# Altium PCB BP and Sensors.PcbDoc
Units mm, origin at the board's own origin, x right, y up, seen from the top; angles counter-clockwise.
Board outline 110 x 120 mm, 2 copper layers (Top Layer, Bottom Layer); 86 components, 108 nets, 295 pads, 0 vias.
Unrouted connection lines stored in the file: 165.
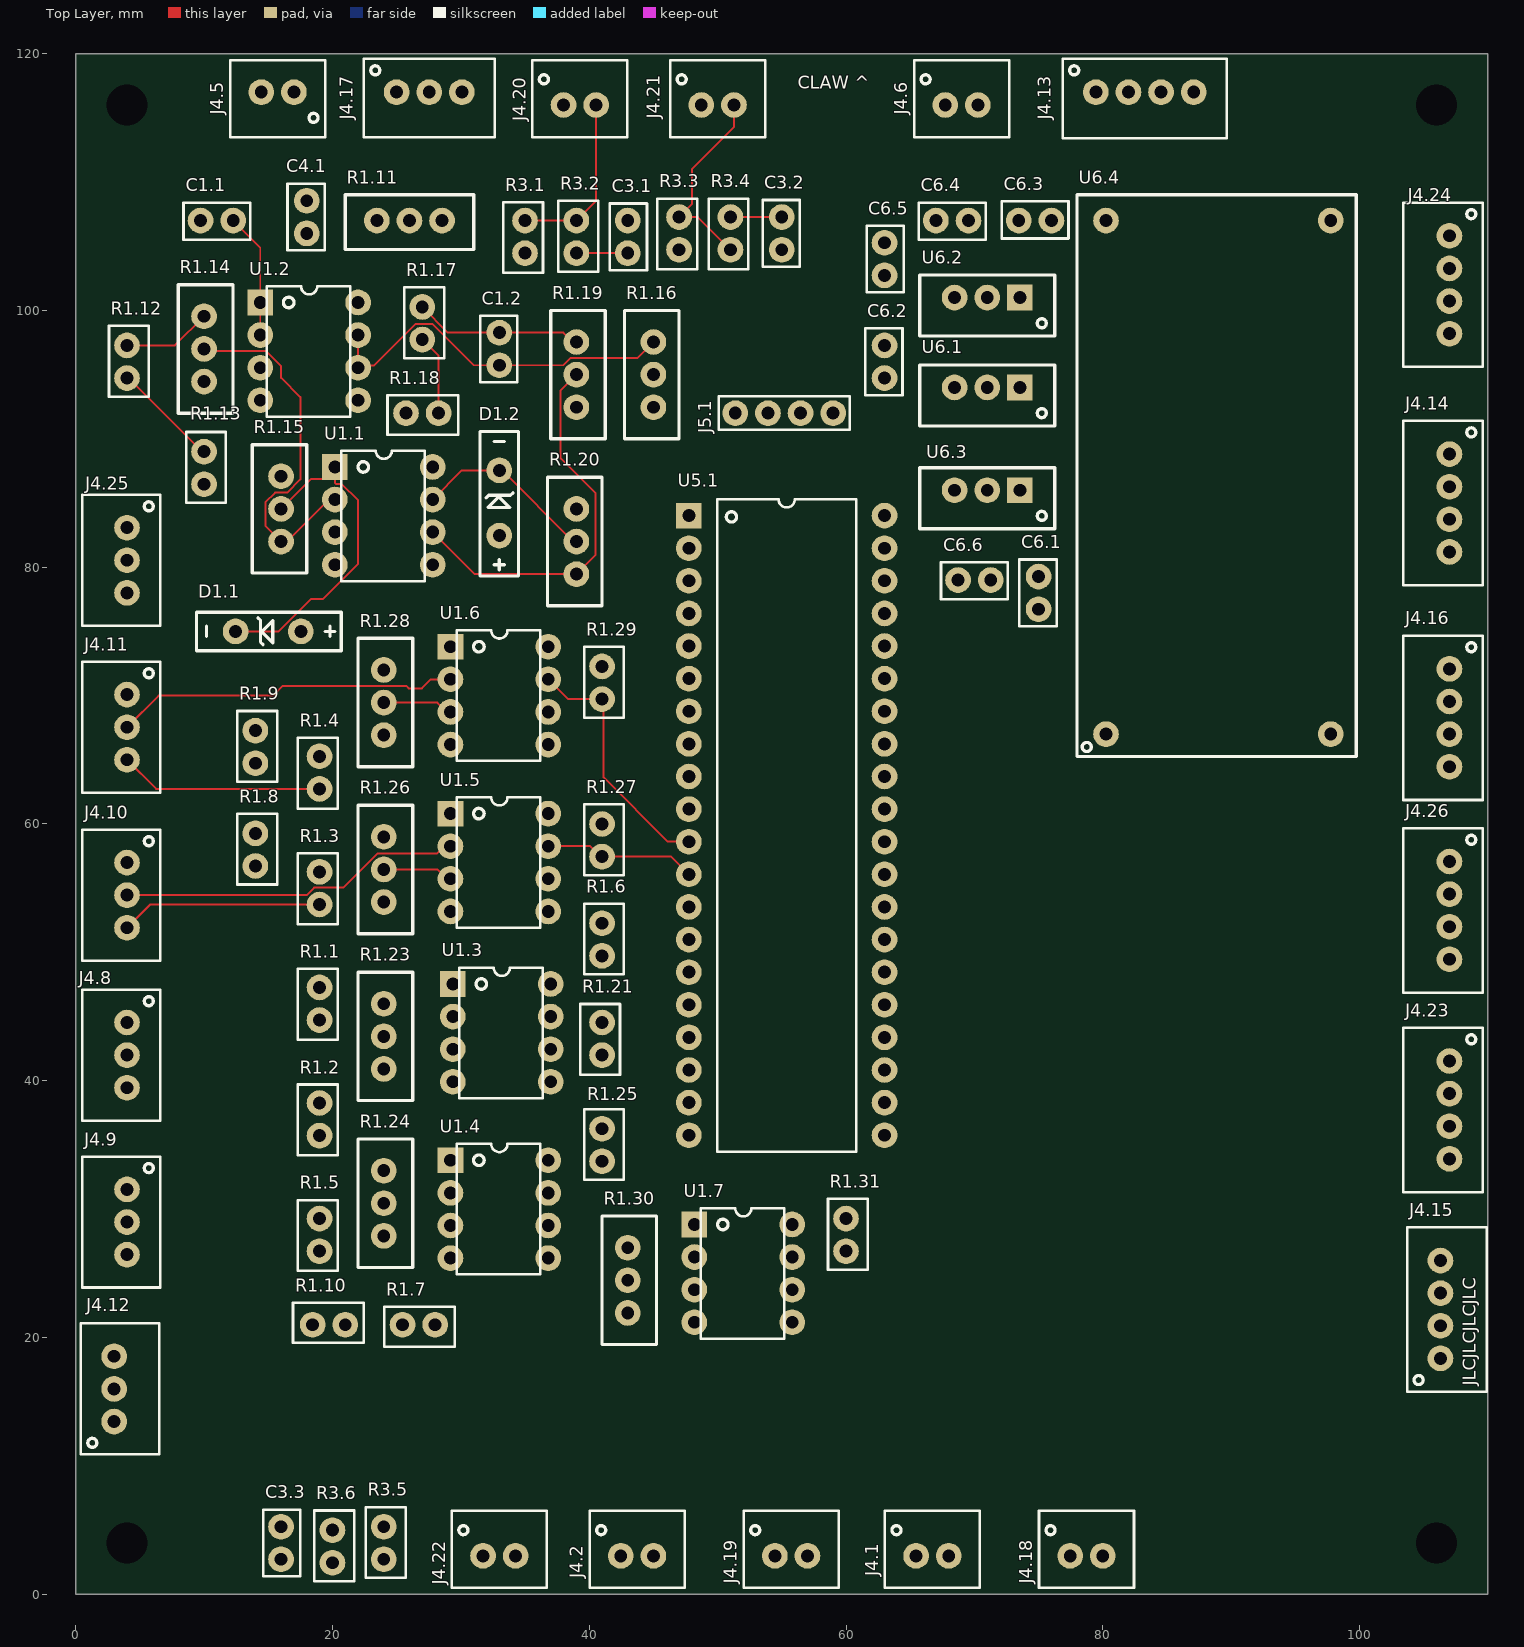
[diagram p0: Top Layer view]
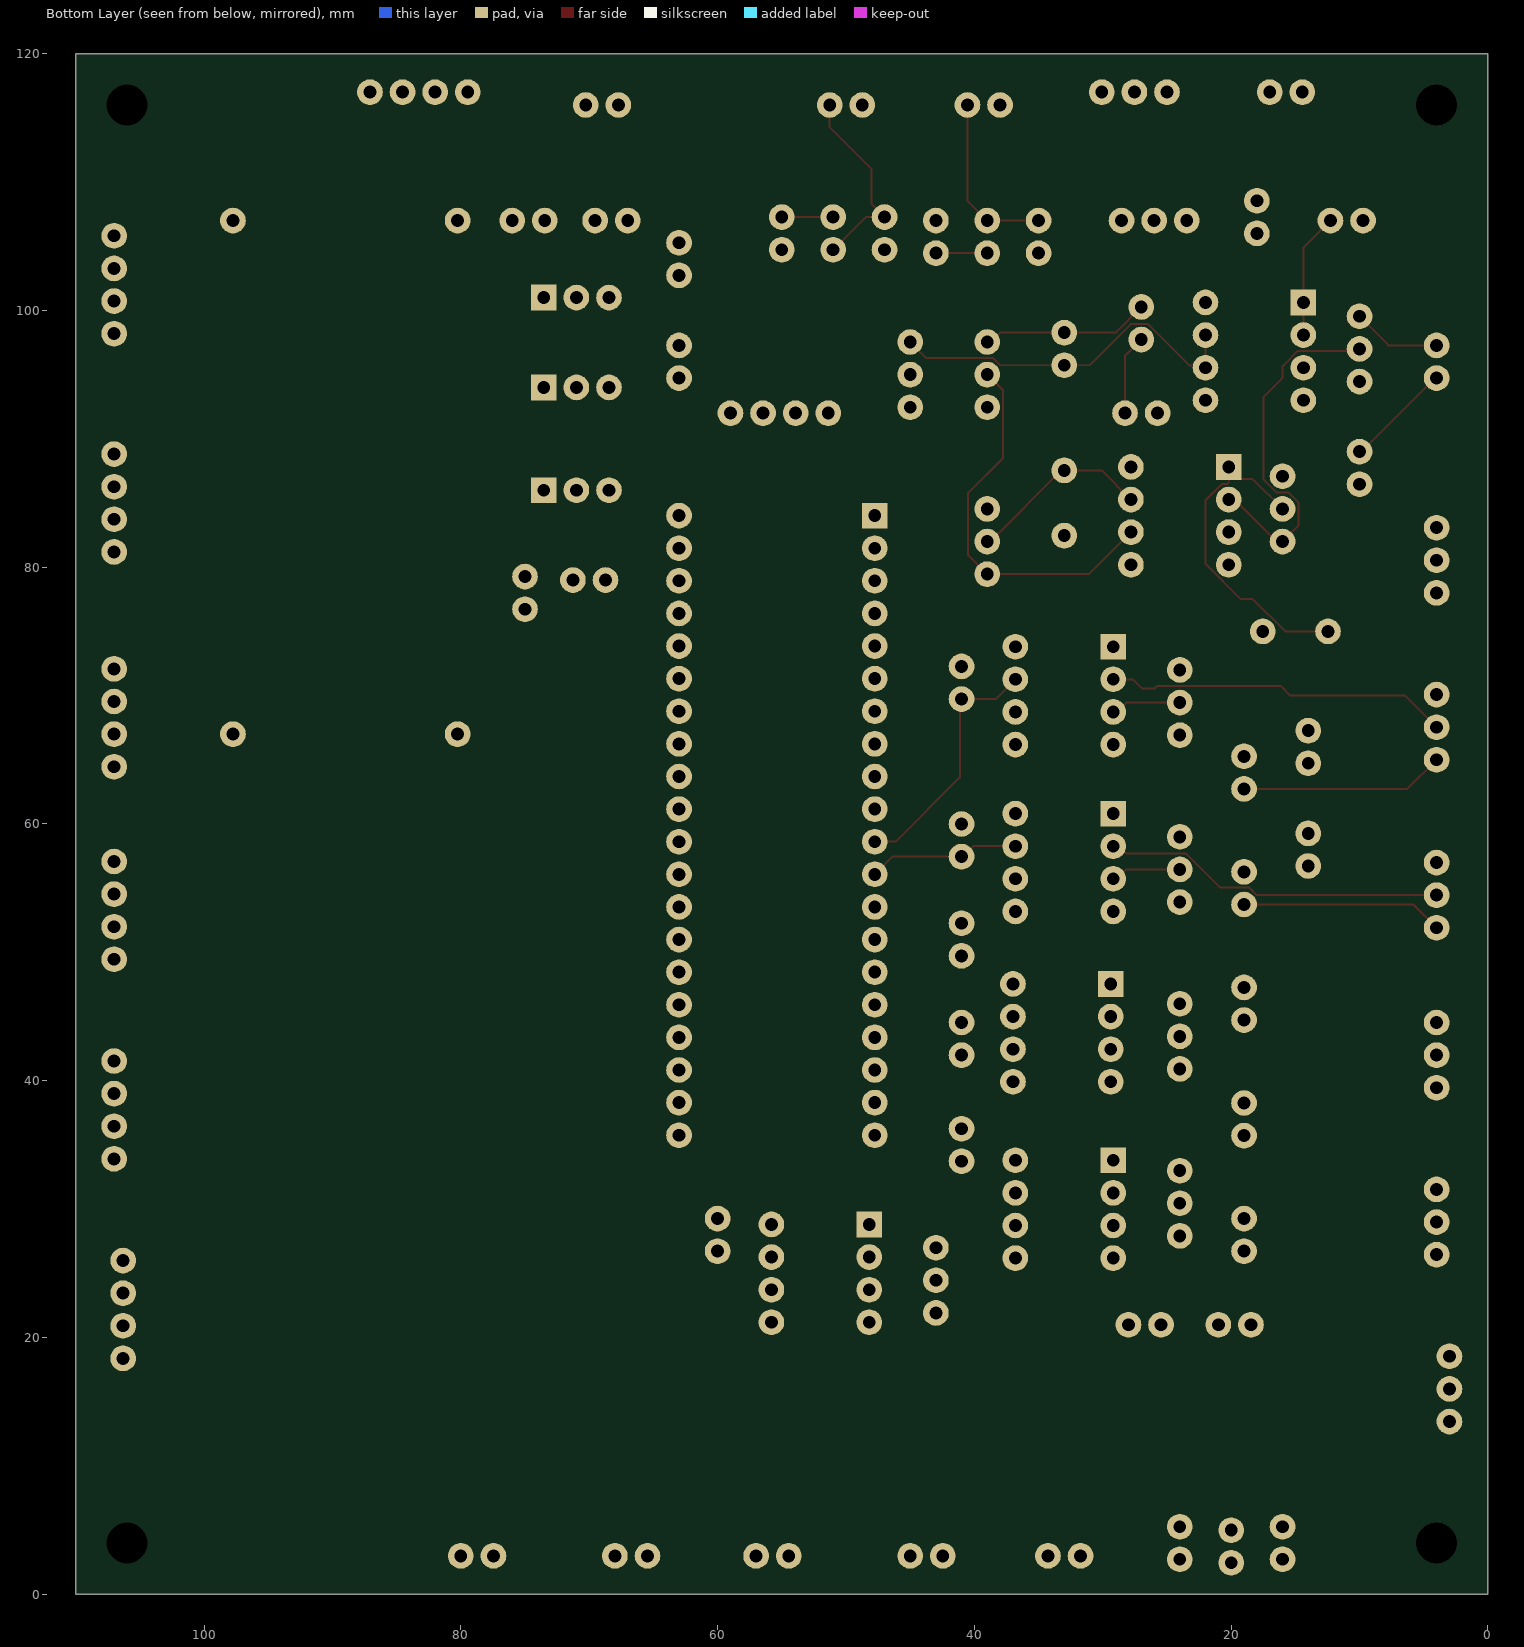
[diagram p1: Bottom Layer view, seen from below]

## Layer stack, top to bottom
Top Solder: solder mask 0.0102, Solder Resist, Dk 3.5
Top Layer: signal copper 0.0356
Dielectric 1: dielectric 0.32, FR-4, Dk 4.8
Bottom Layer: signal copper 0.0356
Bottom Solder: solder mask 0.0102, Solder Resist, Dk 3.5

## Board outline
0,0 0,120 110,120 110,0

## Design rules (kind name [scope] priority, off if disabled: settings)
BoardOutlineClearance [All] p1: gap=0.2 ignorepadtopadclearanceinfootprint=FALSE
Clearance [All] p1: gap=0.152 ignorepadtopadclearanceinfootprint=FALSE
HoleSize [All] p1: absolutevalues=TRUE maxlimit=100 minlimit=0.4 maxpercent=80.000 minpercent=20.000
PolygonConnect [All] p1: connectstyle=Relief reliefconductorwidth=0.254 reliefentries=4 polygonreliefangle="90 Angle" airgapwidth=0.254
RoutingVias [All] p1: holewidth=0.4 width=0.8 viastyle="Through Hole" minholewidth=0.4 minwidth=0.6 maxholewidth=100 maxwidth=100
SilkToSilkClearance [All] p1: silktosilkclearance=0
SilkToSolderMaskClearance [IsPad] p1: minsilkscreentomaskgap=0 clearancetoexposedcopper=TRUE
SolderMaskExpansion [All] p1: expansion=0.102 istentingtop=FALSE
Width [All] p1: maxlimit=100 minlimit=0.152 preferedwidth=0.152
27 further rules are at their usual default settings.

## Components (designator, comment, footprint, x,y, rotation, side; value= is the part's Value field where it differs from the comment)
C1.1 "470n" "Non Polarized Cap" 11,107 r180 top
C1.2 "470n" "Non Polarized Cap" 33,97 r90 top
C3.1 "100n" "Non Polarized Cap" 43,105.73 r270 top
C3.2 "100n" "Non Polarized Cap" 55,106 r90 top
C3.3 "100n" "Non Polarized Cap" 16,4 r270 top
C4.1 "10n" "Non Polarized Cap" 18,107.27 r90 top
C6.1 "470n" "Non Polarized Cap" 75,78 r90 top
C6.2 "100n" "Non Polarized Cap" 63,96 r90 top
C6.3 "470n" "Non Polarized Cap" 74.73,107 r0 top
C6.4 "100n" "Non Polarized Cap" 68.27,107 r180 top
C6.5 "470n" "Non Polarized Cap" 63,104 r270 top
C6.6 "100n" "Non Polarized Cap" 70,79 r180 top
D1.1 "3.3V" "Zener Generic" 15,75 r180 top
D1.2 "3.3V" "Zener Generic" 33,85 r90 top
J4.1 "Right Motor" "2pos JST" 66.73,3 r0 top
J4.2 "Left Motor" "2pos JST" 43.73,3 r0 top
J4.5 "IR Left" "2pos JST" 15.73,117 r180 top
J4.6 "IR Right" "2pos JST" 69,116 r0 top
J4.8 "Front Right Reflectance" "3pos JST" 4,42 r270 top
J4.9 "Front Left Reflectance" "3pos JST" 4,29 r270 top
J4.10 "Side Right Reflectance" "3pos JST" 4,54.46 r270 top
J4.11 "Side Left Reflectance" "3pos JST" 4,67.54 r270 top
J4.12 "Rear Reflectance" "3pos JST" 3,16 r90 top
J4.13 "Sonar Front Middle" "4Pos JST" 83.27,117 r0 top
J4.14 "4pos" "4Pos JST" 107,85 r270 top
J4.15 "Sonar Side Left" "4Pos JST" 106.3,22.19 r90 top
J4.16 "Sonar Side Right" "4Pos JST" 107,68.27 r270 top
J4.17 "Magnet Sensor" "3pos JST" 27.54,117 r0 top
J4.18 "8V Lipo" "2pos JST" 78.73,3 r0 top
J4.19 "2pos" "2pos JST" 55.73,3 r0 top
J4.20 "Claw Microswitch" "2pos JST" 39.27,116 r0 top
J4.21 "Front Microswitch" "2pos JST" 50,116 r0 top
J4.22 "Rear Microswitch" "2pos JST" 33,3 r0 top
J4.23 "4pos" "4Pos JST" 107,37.73 r270 top
J4.24 "SWD BP" "4Pos JST" 107,102 r270 top
J4.25 "Spare BP Pins" "3pos JST" 4,80.54 r270 top
J4.26 "Sonar Spare" "4Pos JST" 107,53.27 r270 top
J5.1 "Debug" "Four Pads" 55.19,92 r180 top
R1.1 "100" Res_Generic 19,46 r270 top
R1.2 "100" Res_Generic 19,37 r270 top
R1.3 "100" Res_Generic 19,55 r270 top
R1.4 "100" Res_Generic 19,64 r270 top
R1.5 "100" Res_Generic 19,28 r270 top
R1.6 "47k" Res_Generic 41,51 r90 top
R1.7 "47k" Res_Generic 26.73,21 r0 top
R1.8 "47k" Res_Generic 14,58 r90 top
R1.9 "47k" Res_Generic 14,66 r90 top
R1.10 "47k" Res_Generic 19.73,21 r180 top
R1.11 "100k" "Pot Generic" 26,107 r180 top
R1.12 "100" Res_Generic 4,96 r90 top
R1.13 "100" Res_Generic 10,87.73 r90 top
R1.14 "10k" "Pot Generic" 10,97 r270 top
R1.15 "100k" "Pot Generic" 16,84.54 r90 top
R1.16 "100k" "Pot Generic" 45,95 r90 top
R1.17 "100" Res_Generic 27,99 r90 top
R1.18 "100" Res_Generic 27,92 r0 top
R1.19 "10k" "Pot Generic" 39,95 r270 top
R1.20 "100k" "Pot Generic" 39,82 r90 top
R1.21 "10k" Res_Generic 41,43.27 r270 top
R1.23 "10k" "Pot Generic" 24,43.46 r270 top
R1.24 "10k" "Pot Generic" 24,30.46 r270 top
R1.25 "10k" Res_Generic 41,35 r90 top
R1.26 "10k" "Pot Generic" 24,56.46 r270 top
R1.27 "10k" Res_Generic 41,58.73 r90 top
R1.28 "10k" "Pot Generic" 24,69.46 r270 top
R1.29 "10k" Res_Generic 41,71 r90 top
R1.30 "10k" "Pot Generic" 43,24.46 r270 top
R1.31 "10k" Res_Generic 60,28 r90 top
R3.1 "10k" Res_Generic 35,105.73 r270 top
R3.2 "1k" Res_Generic 39,105.73 r90 top
R3.3 "10k" Res_Generic 47,106 r270 top
R3.4 "1k" Res_Generic 51,106 r270 top
R3.5 "10k" Res_Generic 24,4 r90 top
R3.6 "1k" Res_Generic 20,3.73 r90 top
U1.1 "TL082IP" DIP8 24,84 r0 top
U1.2 "TL082IP" DIP8 18.19,96.81 r0 top
U1.3 "LM311" DIP8 33.19,43.73 r0 top
U1.4 "LM311" DIP8 33,30 r0 top
U1.5 "LM311" DIP8 33,57 r0 top
U1.6 "LM311" DIP8 33,70 r0 top
U1.7 "LM311" DIP8 52,25 r0 top
U5.1 "Bluepill" DIP40 55.38,59.89 r0 top
U6.1 "5V XTRA" TO220 71,94 r180 top
U6.2 "UA78M33" TO220 71,101 r180 top
U6.3 "UA78M33" TO220 71,86 r180 top
U6.4 "ADJ" "ADJ Switcher" 89,87 r90 top

## Footprints (in the part's own frame and the unit in brackets; to place one, negate y for a bottom-side part, rotate by r counter-clockwise, add the part's x,y. Pads: shape width x height; smd on the part's side, far side on the other; paste and mask are expansions set on the pad)
"2pos JST" [mm]
  round 2 hole 1: 1(-1.27,0) 2(1.27,0)
  silkscreen extent -3.7,-2.5 3.7,3.5, body extent -3.7,-2.4 3.7,3.35, height 7.01
"3pos JST" [mm]
  round 2 hole 1: 1(-2.54,0) 2(0,0) 3(2.54,0)
  silkscreen extent -5.1,-3.5 5.1,2.6, body extent -4.95,-3.35 4.95,2.4, height 7
"4Pos JST" [mm]
  round 2 hole 1: 1(-3.81,0) 2(-1.27,0) 3(1.27,0) 4(3.81,0)
  silkscreen extent -6.4,-3.6 6.4,2.6, body extent -6.2,-3.38 6.2,2.37, height 7.01
"ADJ Switcher" [mm]
  round 2 hole 1: 1(-20,8.75) 2(-20,-8.75) 3(20,-8.75) 4(20,8.75)
  silkscreen extent -21.75,-10.75 22,11, body extent -21.5,-10.5 21.7,10.75, height 13.36
DIP8 [mm]
  rect 2x2 hole 1: 1(-3.81,3.81)
  round 2 hole 1: 2(-3.81,1.27) 3(-3.81,-1.27) 4(-3.81,-3.81) 5(3.81,-3.81) 6(3.81,-1.27) 7(3.81,1.27) 8(3.81,3.81)
  silkscreen extent -3.3,-5.08 3.2,5.08, body extent -3.96,-4.79 3.91,4.79, height 5.33
DIP40 [mm]
  rect 2x2 hole 1: 1(-7.62,24.13)
  round 2 hole 1: 2(-7.62,21.59) 3(-7.62,19.05) 4(-7.62,16.51) 5(-7.62,13.97) 6(-7.62,11.43) 7(-7.62,8.89) 8(-7.62,6.35) 9(-7.62,3.81) 10(-7.62,1.27) 11(-7.62,-1.27) 12(-7.62,-3.81) 13(-7.62,-6.35) 14(-7.62,-8.89) 15(-7.62,-11.43) 16(-7.62,-13.97) 17(-7.62,-16.51) 18(-7.62,-19.05) 19(-7.62,-21.59) 20(-7.62,-24.13) 21(7.62,-24.13) 22(7.62,-21.59) 23(7.62,-19.05) 24(7.62,-16.51) 25(7.62,-13.97) 26(7.62,-11.43) 27(7.62,-8.89) 28(7.62,-6.35) 29(7.62,-3.81) 30(7.62,-1.27) 31(7.62,1.27) 32(7.62,3.81) 33(7.62,6.35) 34(7.62,8.89) 35(7.62,11.43) 36(7.62,13.97) 37(7.62,16.51) 38(7.62,19.05) 39(7.62,21.59) 40(7.62,24.13)
  silkscreen extent -5.42,-25.4 5.42,25.4, body extent -8.7,-25.67 8.8,25.63, height 4.71
"Four Pads" [mm]
  round 2 hole 1: 1(-3.81,0) 2(-1.27,0) 3(1.27,0) 4(3.81,0)
  silkscreen extent -5.1,-1.3 5.1,1.3
"Non Polarized Cap" [mm] "Cap Generic THT"
  round 2 hole 1: 1(-1.27,0) 2(1.27,0)
  silkscreen extent -2.6,-1.4 2.6,1.5, body extent -2,-1.2 2,1.3, height 6
"Pot Generic" [mm]
  round 2 hole 1: 1(-2.54,0) 2(0,0) 3(2.54,0)
  silkscreen extent -5,-2 5,2.25, body extent -4.89,-1.86 4.89,2.15, height 11.41
Res_Generic [mm] "Cap Generic THT Footprint"
  round 2 hole 1: 1(-1.27,0) 2(1.27,0)
  silkscreen extent -2.71,-1.7 2.8,1.4, body extent -1.47,-1.3 2.4,1, height 8.18
TO220 [mm]
  rect 2x2 hole 1: 1(-2.54,0)
  round 2 hole 1: 2(0,0) 3(2.54,0)
  silkscreen extent -5.25,-1.75 5.25,3, body extent -5.08,-1.66 5.08,2.91, height 19.6
"Zener Generic" [mm]
  round 2 hole 1: 1(-2.54,0) 2(2.54,0)
  silkscreen extent -5.68,-1.5 5.58,1.5, body extent -3.12,-1.86 4.37,1.86, height 11.55

## Part data
C1.1 C1.2 C3.1 C3.2 C3.3 C4.1 C6.1 C6.2 C6.3 C6.4 C6.5 C6.6: library part Cap_Generic
D1.1 D1.2: library part Zener_Generic
J4.1 J4.2 J4.5 J4.6 J4.18 J4.19 J4.20 J4.21 J4.22: library part "2pos Conn", "2pos Conn JST"
J4.8 J4.9 J4.10 J4.11 J4.12 J4.17 J4.25: library part "3pos Conn", "3pos Conn"
J4.13 J4.14 J4.15 J4.16 J4.23 J4.24 J4.26: library part "4pos Conn", "4pos Conn"
J5.1: library part "BP SWD Conn"
R1.1 R1.2 R1.3 R1.4 R1.5 R1.6 R1.7 R1.8 R1.9 R1.10 R1.12 R1.13 R1.17 R1.18 R1.21 R1.25 R1.27 R1.29 R1.31 R3.1 R3.2 R3.3 R3.4 R3.5 R3.6: library part Res_Generic
R1.11 R1.14 R1.15 R1.16 R1.19 R1.20 R1.23 R1.24 R1.26 R1.28 R1.30: library part Pot_Generic
U1.1 U1.2: library part "TL082IP Op Amp", "TL082IP IC OPAMP JFET 2 CIRCUIT 8DIP", Supplier Part Number 1=595-TL082IP, Supplier 1=Mouser
U1.3 U1.4 U1.5 U1.6 U1.7: library part "LM311 Comparator", "LM311 IC DIFF COMPARATOR STROBE 8-DIP", Supplier Part Number 1=595-LM311P, Supplier 1=Mouser
U5.1: "STM32F103C8T6"
U6.1: library part "UA7805 5V Reg", "UA7805 IC REG LINEAR 5V 1.5A TO220-3", Supplier Part Number 1=296-39515-5-ND, Supplier 1=Digi-Key
U6.2 U6.3: library part "UA78M33CKCS 3.3V Reg", "UA78M33 IC REG LINEAR 3.3V 500MA TO220-3", Supplier Part Number 1=595-UA78M33CKCS, Supplier 1=Mouser
U6.4: library part LM2596S, "Adjutable Switcher 3.5A Max"

## Free pads (board coordinates)
  round 0 hole 3.2: ""(4,4) ""(4,116) ""(106,4) ""(106,116)

## Nets (pads, with @x,y where several pads share a name; then routed paths per layer and width w, separated by ;. In a path a pad name is that pad's centre, name@x,y a point inside that pad or via, vN(x,y) a via of type N, cw(c..) or ccw(c..) an arc to the next point about the centre after c; other vN are vias at no path point)
3.3V_BP: C6.6.2 U5.1.1 U5.1.18 U5.1.40 U6.3.3
3.3V_P: C6.4.2 J4.5.2 J4.6.2 J4.14.3 J4.17.3 R1.6.1 R1.7.1 R1.8.1 R1.9.1 R1.10.1 R1.21.2 R1.23.3 R1.24.3 R1.25.2 R1.26.3 R1.27.2 R1.28.3 R1.29.2 R1.30.3 R1.31.2 R3.1.2 R3.3.2 R3.5.2 U1.3.8 U1.4.8 U1.5.8 U1.6.8 U1.7.8 U6.2.3
5V_ARM: 
5V_P: J4.13.4 J4.14.2 J4.15.4 J4.16.4 J4.26.4 R1.1.1 R1.2.1 R1.3.1 R1.4.1 R1.5.1 U1.1.8 U1.2.8 U6.4.4
5V_SERVO: 
5V_XTRA: C6.2.2 J4.14.4 U6.1.3
8V: C6.1.2 C6.3.2 C6.5.2 J4.18.2 U6.1.1 U6.2.1 U6.3.1 U6.4.1
15V: 
ARM_SERV_BP_IN: 
ARM_SERV_BP_OUT: J4.23.3 U5.1.26
ARM_SERV_PWM: 
BOX_SERV_BP_IN: 
BOX_SERV_BP_OUT: J4.23.1 U5.1.7
BOX_SERV_PWM: 
BRIDGE_SERV_BP_IN: 
BRIDGE_SERV_BP_OUT: J4.23.2 U5.1.27
BRIDGE_SERV_PWM: 
CLAW_SERV_BP_IN: 
CLAW_SERV_BP_OUT: J4.23.4 U5.1.25
CLAW_SERV_PWM: 
DCLK: J4.24.2 J5.1.3
DIO: J4.24.3 J5.1.2
ECHO_F_M: J4.13.2 U5.1.30
ECHO_S_L: J4.15.2 U5.1.33
ECHO_S_R: J4.16.2 U5.1.32
ECHO_SPARE: J4.26.2 U5.1.31
ENCODER_L: J4.19.2 U5.1.28
ENCODER_R: J4.19.1 U5.1.29
IR_LEFT_TRANS: C1.1.1 J4.5.1 R1.11.3 U1.2.1 U1.2.2 | length 9.8
  Top Layer w0.152: C1.1.1 14.38,104.89 U1.2.1 U1.2.2
IR_RIGHT_TRANS: C1.2.1 J4.6.1 R1.16.3 U1.2.6 U1.2.7 | length 29
  Top Layer w0.152: U1.2.7 U1.2.6 22.156,95.696 23.229,95.696 26.491,98.959 27.791,98.959 31.02,95.73 C1.2.1 37.992,95.73 38.574,96.311 43.771,96.311 R1.16.3
IR_SNS_LEFT: D1.1.2 R1.15.2 U1.1.1 U5.1.9 | length 25.8
  Top Layer w0.152: D1.1.2 15.802,75 18.32,77.517 19.255,77.517 22,80.262 22,85.198 20.699,86.499 20.279,86.499 20.19,86.588 U1.1.1 19.266,86.886 18.346,86.886 R1.15.2
IR_SNS_RIGHT: D1.2.2 R1.20.2 U1.1.7 U5.1.10 | length 14.4
  Top Layer w0.152: U1.1.7 30.08,87.54 D1.2.2 33.23,87.54 38.77,82 R1.20.2
LEFT+: 
LEFT-: 
LEFT_FWD: 
LEFT_FWD_BP_IN: 
LEFT_FWD_BP_OUT: J4.2.2 U5.1.34
LEFT_REV: 
LEFT_REV_BP_IN: 
LEFT_REV_BP_OUT: J4.2.1 U5.1.35
M_GND: 
MAGNET_SNS: J4.17.2 U5.1.24
NetC1.1_2: C1.1.2 R1.12.2 R1.14.1 | length 6.9
  Top Layer w0.152: R1.12.2 7.73,97.27 R1.14.1
NetC1.2_2: C1.2.2 R1.17.2 R1.19.1 | length 13.1
  Top Layer w0.152: R1.17.2 29,98.27 C1.2.2 37.992,98.27 38.722,97.54 R1.19.1
NetC4.1_2: C4.1.2 J4.17.1
NetQ2.13_1: 
NetQ2.14_1: 
NetQ2.15_1: 
NetQ2.16_1: 
NetR1.12_1: R1.12.1 R1.13.2 | length 8.4
  Top Layer w0.152: R1.12.1 4.135,94.73 9.865,89 R1.13.2
NetR1.14_2: R1.14.2 R1.15.1 U1.1.2 | length 28.6
  Top Layer w0.152: R1.14.2 10.149,96.851 14.806,96.851 16,95.657 16,94.75 17.5,93.25 17.5,86.842 16.468,85.81 15.532,85.81 14.771,85.049 14.771,83.229 R1.15.1 16.46,82 19.73,85.27 U1.1.2
NetR1.17_1: R1.17.1 R1.18.2 | length 6.3
  Top Layer w0.152: R1.17.1 28.27,96.46 R1.18.2
NetR1.19_2: R1.19.2 R1.20.1 U1.1.6 | length 30.3
  Top Layer w0.152: U1.1.6 31.08,79.46 R1.20.1 40.5,80.96 40.5,85.75 37.771,88.479 37.771,93.771 R1.19.2
NetR1.23_2: R1.23.2 U1.3.3
NetR1.24_2: R1.24.2 U1.4.3
NetR1.26_2: R1.26.2 U1.5.3 | length 5.5
  Top Layer w0.152: R1.26.2 28.182,56.46 28.912,55.73 U1.5.3
NetR1.28_2: R1.28.2 U1.6.3 | length 5.5
  Top Layer w0.152: R1.28.2 28.183,69.46 28.913,68.73 U1.6.3
NetR1.30_2: R1.30.2 U1.7.3
NetR2.1_2: 
NetR2.2_2: 
NetR2.3_1: 
NetR2.4_1: 
NetR2.5_2: 
NetR2.6_2: 
NetR2.7_2: 
NetR2.8_2: 
NetR2.9_2: 
NetR2.10_2: 
NetR2.11_1: 
NetR2.12_1: 
NetR2.13_2: 
NetR2.14_2: 
NetR2.15_2: 
NetR2.16_1: 
P_GND: C3.1.1 C3.2.1 C3.3.1 C4.1.1 C6.1.1 C6.2.1 C6.3.1 C6.4.1 C6.5.1 C6.6.1 D1.1.1 D1.2.1 J4.8.1 J4.9.1 J4.10.1 J4.11.1 J4.12.1 J4.13.3 J4.14.1 J4.15.3 J4.16.3 J4.18.1 J4.20.1 J4.21.1 J4.22.1 J4.26.3 R1.11.2 R1.13.1 R1.16.2 R1.18.1 R1.23.1 R1.24.1 R1.26.1 R1.28.1 R1.30.1 U1.1.3 U1.1.4 U1.1.5 U1.2.3 U1.2.4 U1.2.5 U1.3.1 U1.3.4 U1.4.1 U1.4.4 U1.5.1 U1.5.4 U1.6.1 U1.6.4 U1.7.1 U1.7.4 U5.1.19 U5.1.20 U5.1.39 U6.1.2 U6.2.2 U6.3.2 U6.4.2 U6.4.3
REF_F_L_COL: J4.9.2 R1.7.2 U1.4.2
REF_F_L_LED: J4.9.3 R1.2.2
REF_F_L_SNS: R1.25.1 U1.4.7 U5.1.13
REF_F_R_COL: J4.8.2 R1.6.2 U1.3.2
REF_F_R_LED: J4.8.3 R1.1.2
REF_F_R_SNS: R1.21.1 U1.3.7 U5.1.14
REF_R_COL: J4.12.2 R1.10.2 U1.7.2
REF_R_LED: J4.12.3 R1.5.2
REF_R_SNS: R1.31.1 U1.7.7 U5.1.21
REF_S_L_COL: J4.11.2 R1.9.2 U1.6.2 | length 26.9
  Top Layer w0.152: J4.11.2 6.46,70 15.39,70 16.14,70.75 25.75,70.75 25.937,70.563 26.96,70.563 27.667,71.27 U1.6.2
REF_S_L_LED: J4.11.3 R1.4.2 | length 15.9
  Top Layer w0.152: J4.11.3 6.27,62.73 R1.4.2
REF_S_L_SNS: R1.29.1 U1.6.7 U5.1.11 | length 19.7
  Top Layer w0.152: U1.6.7 38.35,69.73 R1.29.1 41.125,69.605 41.125,63.625 46.13,58.62 U5.1.11
REF_S_R_COL: J4.10.2 R1.8.2 U1.5.2 | length 26.8
  Top Layer w0.152: J4.10.2 17.992,54.46 18.574,55.041 20.844,55.041 23.503,57.701 28.121,57.701 28.69,58.27 U1.5.2
REF_S_R_LED: J4.10.3 R1.3.2 | length 15.7
  Top Layer w0.152: J4.10.3 5.81,53.73 R1.3.2
REF_S_R_SNS: R1.27.1 U1.5.7 U5.1.12 | length 11.9
  Top Layer w0.152: U1.5.7 40.073,58.27 40.883,57.46 R1.27.1 46.38,57.46 U5.1.12
RIGHT+: 
RIGHT-: 
RIGHT_FWD: 
RIGHT_FWD_BP_IN: 
RIGHT_FWD_BP_OUT: J4.1.2 U5.1.36
RIGHT_REV: 
RIGHT_REV_BP_IN: 
RIGHT_REV_BP_OUT: J4.1.1 U5.1.37
SPARE_1: J4.25.3 U5.1.8
SPARE_2: J4.25.2 U5.1.6
SPARE_3: J4.25.1 U5.1.5
SW_CLAW_+: J4.20.2 R3.1.1 R3.2.2 | length 13.6
  Top Layer w0.152: R3.1.1 R3.2.2 40.54,108.54 J4.20.2
SW_CLAW_SNS: C3.1.2 R3.2.1 U5.1.15 | length 4
  Top Layer w0.152: R3.2.1 C3.1.2
SW_FRONT_+: J4.21.2 R3.3.1 R3.4.2 | length 15.6
  Top Layer w0.152: R3.4.2 48.46,107.27 R3.3.1 48,108.27 48,111 51.27,114.27 J4.21.2
SW_FRONT_SNS: C3.2.2 R3.4.1 U5.1.16 | length 4
  Top Layer w0.152: R3.4.1 C3.2.2
SW_REAR_+: J4.22.2 R3.5.1 R3.6.2
SW_REAR_SNS: C3.3.2 R3.6.1 U5.1.22
TRIG_COM: J4.13.1 J4.15.1 J4.16.1 J4.26.1 U5.1.23
pads on no net: J4.24.1 J4.24.4 J5.1.1 J5.1.4 R1.11.1 R1.14.3 R1.15.3 R1.16.1 R1.19.3 R1.20.3 U1.3.5 U1.3.6 U1.4.5 U1.4.6 U1.5.5 U1.5.6 U1.6.5 U1.6.6 U1.7.5 U1.7.6 U5.1.2 U5.1.3 U5.1.4 U5.1.17 U5.1.38

## Silkscreen, mask and mechanical layers (free items; w line width, h text height)
Top Overlay:
  text "CLAW ^" at 56.254,117.254 h1
  text "JLCJLCJLCJLC" at 109.046,16.254 h1 r90